# EAGLE board thermostatMechanical2 (EAGLE 7.0.0)

Size 100 x 80 mm. Coordinates in mm from the lower left corner, seen from the top.
Outline: 0,0 100,0 100,80 0,80 0,0
Copper layers (1*16): Top 0.035mm / dielectric 1.5mm / Bottom 0.035mm
Design rules "default": minimum track width 10mil, minimum drill 24mil, track to track 8mil, track to pad 8mil, pad to pad 8mil, via to via 8mil, smd to smd 8mil, copper to edge 40mil, drill to drill 8mil, minimum pad ring 10mil, minimum via ring 8mil, stop-mask expansion 4mil, vias tented up to drill 0mil, thermal gap 10mil

## Footprints (pad centres in the part's own frame; a part is rotated, then mirrored left to right if it is on the bottom)
CPOL-RADIAL-1000UF-25V = drill 0.9 pad 1.93 square: + 2.54,0 | drill 0.9 pad 1.93: - -2.54,0
1206 = smd 1.6 x 1.8: 1 -1.4,0; 2 1.4,0
DIODE-1N4148 = drill 0.9 pad 1.88: A -3.81,0; C 3.81,0
DO41-10 = drill 1.118: A 5.08,0; C -5.08,0
1X03 = drill 1.016 pad 1.88: 1 0,0; 2 2.54,0; 3 5.08,0
1X09 = drill 1.016 pad 1.88: 1 0,0; 2 2.54,0; 3 5.08,0; 4 7.62,0; 5 10.16,0; 6 12.7,0; 7 15.24,0; 8 17.78,0; 9 20.32,0
FTDI_BASIC = drill 1.016 pad 1.88: CTS 10.16,0; DTR 0,0; GND 12.7,0; RXI 2.54,0; TXO 5.08,0; VCC 7.62,0
2X3-NS = drill 1.016 pad 1.88 square: 1 -2.54,-1.27 | drill 1.016 pad 1.88 octagon: 2 -2.54,1.27; 3 0,-1.27; 4 0,1.27; 5 2.54,-1.27; 6 2.54,1.27
POWER_JACK_PTH = drill 2.997 pad 4.318: GND 0,7.7; GNDBREAK 4.7,10.7; PWR 0,13.7
SCREWTERMINAL-5MM-2 = drill 1.3 pad 2.032 square: 1 0,0 | drill 1.3 pad 2.032: 2 5,0
1X01 = drill 1.016 pad 1.88: 1 0,0
SOT23 = smd 1 x 1.4: 1 -0.95,-1.1; 2 0.95,-1.1; 3 0,1.1
1X05 = drill 1.016 pad 1.88: 1 0,0; 2 2.54,0; 3 5.08,0; 4 7.62,0; 5 10.16,0
TQFP32-08 = smd 1.27 x 0.559: 1 -4.293,2.8; 2 -4.293,2; 3 -4.293,1.2; 4 -4.293,0.4; 5 -4.293,-0.4; 6 -4.293,-1.2; 7 -4.293,-2; 8 -4.293,-2.8; 17 4.293,-2.8; 18 4.293,-2; 19 4.293,-1.2; 20 4.293,-0.4; 21 4.293,0.4; 22 4.293,1.2; 23 4.293,2; 24 4.293,2.8 | smd 0.559 x 1.27: 9 -2.8,-4.293; 10 -2,-4.293; 11 -1.2,-4.293; 12 -0.4,-4.293; 13 0.4,-4.293; 14 1.2,-4.293; 15 2,-4.293; 16 2.8,-4.293; 25 2.8,4.293; 26 2,4.293; 27 1.2,4.293; 28 0.4,4.293; 29 -0.4,4.293; 30 -1.2,4.293; 31 -2,4.293; 32 -2.8,4.293
RELAY-JZC = drill 1.3 pad 2.286: 1 3.81,-8.89; 2 -3.81,1.651; 3 -3.81,6.35; 4 3.81,3.81; 5 -3.81,-8.89
XBEE = drill 0.8 pad 1.27: 1 -11,9; 2 -11,7; 3 -11,5; 4 -11,3; 5 -11,1; 6 -11,-1; 7 -11,-3; 8 -11,-5; 9 -11,-7; 10 -11,-9; 11 11,-9; 12 11,-7; 13 11,-5; 14 11,-3; 15 11,-1; 16 11,1; 17 11,3; 18 11,5; 19 11,7; 20 11,9

## Placement (x,y rotation side)
C1  CAP-09538  [CPOL-RADIAL-1000UF-25V]  20.32,50.8 0 top
C3  [1206]  35.56,72.39 270 top
C4  1.0uF  [1206]  33.02,72.39 90 top
C5  1.0uF  [1206]  24.13,19.05 0 top
D1  [DIODE-1N4148]  57.15,3.81 0 top
D2  [DIODE-1N4148]  45.72,3.81 180 top
D3  [DIODE-1N4148]  80.01,3.81 0 top
D4  [DIODE-1N4148]  91.44,3.81 180 top
D5  1N4004  [DO41-10]  21.59,40.64 180 top
D8  [DIODE-1N4148]  68.58,3.81 180 top
DHT  [1X03]  60.96,74.93 0 top
DISPLAY  M09  [1X09]  72.39,74.93 0 top
FTDI  [FTDI_BASIC]  35.56,77.47 180 top
ICSP  [2X3-NS]  12.7,74.93 0 top
J1  POWER_JACKPTH  [POWER_JACK_PTH]  104.14,38.1 90 top
JP1  M025MM  [SCREWTERMINAL-5MM-2]  3.81,30.48 270 top
JP2  M025MM  [SCREWTERMINAL-5MM-2]  3.81,55.88 270 top
JP3  M025MM  [SCREWTERMINAL-5MM-2]  3.81,68.58 270 top
JP4  M01PTH  [1X01]  34.29,38.1 0 top
JP5  M01PTH  [1X01]  83.82,55.88 0 top
JP6  M01PTH  [1X01]  83.82,38.1 0 top
JP7  M01PTH  [1X01]  34.29,55.88 0 top
JP8  M025MM  [SCREWTERMINAL-5MM-2]  3.81,43.18 270 top
POW  [1X03]  11.43,43.18 270 top
Q1  [SOT23]  71.12,27.94 0 top
Q2  [SOT23]  59.69,27.94 0 top
Q3  [SOT23]  48.26,27.94 0 top
Q4  [SOT23]  82.55,27.94 0 top
Q5  [SOT23]  93.98,27.94 0 top
R1  [1206]  66.04,27.94 270 top
R2  [1206]  54.61,27.94 270 top
R3  [1206]  43.18,27.94 270 top
R4  [1206]  77.47,27.94 270 top
R5  [1206]  87.63,27.94 270 top
RTC  [1X05]  96.52,76.2 270 top
U1  ATMEGA168  [TQFP32-08]  24.13,8.89 0 top
U$1  RELAYPTH4  [RELAY-JZC]  68.58,16.51 0 top
U$3  RELAYPTH4  [RELAY-JZC]  57.15,16.51 0 top
U$4  RELAYPTH4  [RELAY-JZC]  45.72,16.51 0 top
U$5  RELAYPTH4  [RELAY-JZC]  80.01,16.51 0 top
U$7  RELAYPTH4  [RELAY-JZC]  91.44,16.51 0 top
XB1  XBEE  [XBEE]  24.13,16.51 0 top

## Library data of the parts
C1 = SparkFun-Capacitors; PROD_ID: CAP-09538
C3 D1-D4 D8 FTDI ICSP Q1-Q5 R1-R5 = SparkFun
C4 C5 = SparkFun-Capacitors; PROD_ID: CAP-09822
D5 = diode
DHT DISPLAY JP1-JP8 POW RTC = SparkFun-Connectors
J1 = SparkFun-Connectors; PROD_ID: PRT-00119
U1 = SparkFun-DigitalIC
U$1 U$3-U$5 U$7 = SparkFun-Electromechanical
XB1 = maxstream; MPN: XBP24-Z7UIT-004; OC_FARNELL: 1751799; OC_NEWARK: 34R5507

## Nets
3.3V: C5.1 DHT.2 DISPLAY.8 FTDI.VCC U1.4 U1.6 U1.18 U1.20 XB1.1
5V: C4.1 D1.C D2.C D3.C D4.C D8.C ICSP.2 J1.PWR JP7.1 RTC.4 U$1.5 U$3.5 U$4.5 U$5.5 U$7.5
35V: C1.+ D5.C JP4.1
D1_SELECT: DISPLAY.4 U1.14
D2_SELECT: DISPLAY.3 U1.12
DHT_SIG: DHT.1 U1.2
DISPLAY_PWM: DISPLAY.2 U1.13
G_CTRL: R3.1
G_FAN: JP1.2 U1.9 U$4.4
GND: C1.- C4.2 C5.2 DHT.3 DISPLAY.9 FTDI.CTS FTDI.GND ICSP.6 J1.GND J1.GNDBREAK JP1.1 JP5.1 JP6.1 Q1.2 Q2.2 Q3.2 Q4.2 Q5.2 RTC.5 U1.3 U1.5 U1.21 XB1.10
MISO: DISPLAY.6 ICSP.1 U1.16
MOSI: DISPLAY.5 ICSP.4 U1.15
N$1: Q2.1 R2.2
N$2: Q3.1 R3.2
N$3: D8.A Q1.3 U$1.1
N$4: D1.A Q2.3 U$3.1
N$5: D2.A Q3.3 U$4.1
N$6: Q4.1 R4.2
N$7: D3.A Q4.3 U$5.1
N$8: Q1.1 R1.2
N$9: Q5.1 R5.2
N$10: D4.A Q5.3 U$7.1
N$11: C3.1 FTDI.DTR
PIN2: U1.32
PIN3: U1.1
PIN6: U1.10
RC: JP8.2 POW.3
RH: JP8.1 POW.1
RST: C3.2 ICSP.5
RXD: U1.30 XB1.2
RXD0: FTDI.TXO
SCK: DISPLAY.7 ICSP.3 U1.17
SCL: U1.28
SCL_RTC: RTC.2
SD_SELECT: DISPLAY.1 U1.11
SDA: U1.27
SDA_RTC: RTC.3
SQW: RTC.1
TXD: U1.31 XB1.3
TXD0: FTDI.RXI
VAC_IN: D5.A POW.2 U$1.3 U$3.3 U$4.3 U$5.3 U$7.3
W1_CTRL: R1.1 U1.25
W1_HEAT: JP3.1 U$1.4
W2_CTRL: R4.1 U1.26
W2_HEAT: JP3.2 U$5.4
Y1_COOL: JP2.1 U$3.4
Y1_CTRL: R2.1 U1.23
Y2_COOL: JP2.2 U$7.4
Y2_CTRL: R5.1 U1.24

## Tracks (layer width: path | path; a pad name or v marks a point on that pad's centre or on a via)
3.3V  (8 unrouted)
5V  (14 unrouted)
35V  (2 unrouted)
D1_SELECT  (1 unrouted)
D2_SELECT  (1 unrouted)
DHT_SIG  (1 unrouted)
DISPLAY_PWM  (1 unrouted)
G_FAN  (2 unrouted)
GND  (22 unrouted)
MISO  (2 unrouted)
MOSI  (2 unrouted)
N$1  (1 unrouted)
N$2  (1 unrouted)
N$3  (2 unrouted)
N$4  (2 unrouted)
N$5  (2 unrouted)
N$6  (1 unrouted)
N$7  (2 unrouted)
N$8  (1 unrouted)
N$9  (1 unrouted)
N$10  (2 unrouted)
N$11  (1 unrouted)
RC  (1 unrouted)
RH  (1 unrouted)
RST  (1 unrouted)
RXD  (1 unrouted)
SCK  (2 unrouted)
SD_SELECT  (1 unrouted)
TXD  (1 unrouted)
VAC_IN  (6 unrouted)
W1_CTRL  (1 unrouted)
W1_HEAT  (1 unrouted)
W2_CTRL  (1 unrouted)
W2_HEAT  (1 unrouted)
Y1_COOL  (1 unrouted)
Y1_CTRL  (1 unrouted)
Y2_COOL  (1 unrouted)
Y2_CTRL  (1 unrouted)